# Altium PCB RK3568-SOM-Board.PcbDoc
Units mm, origin at the board's own origin, x right, y up, seen from the top; angles counter-clockwise.
Board outline 67.6 x 35.3 mm, 2 copper layers (Top Layer, Bottom Layer), stack 1.071 mm thick; 6 components, 100 nets, 1509 pads, 41 vias.
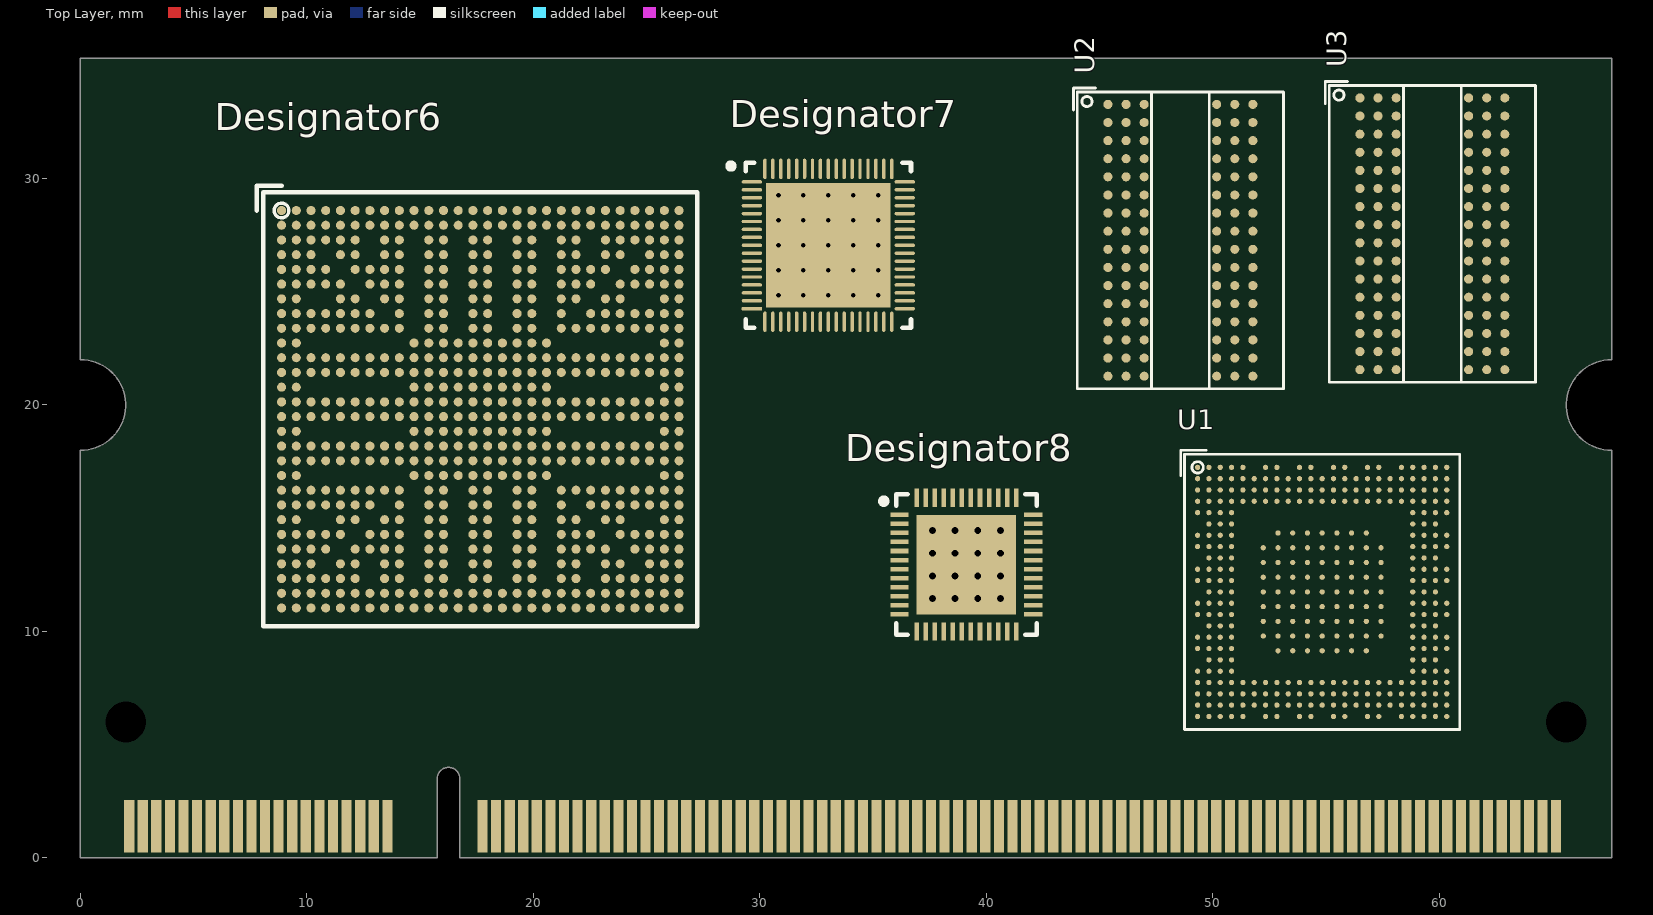
[diagram p0: Top Layer view]
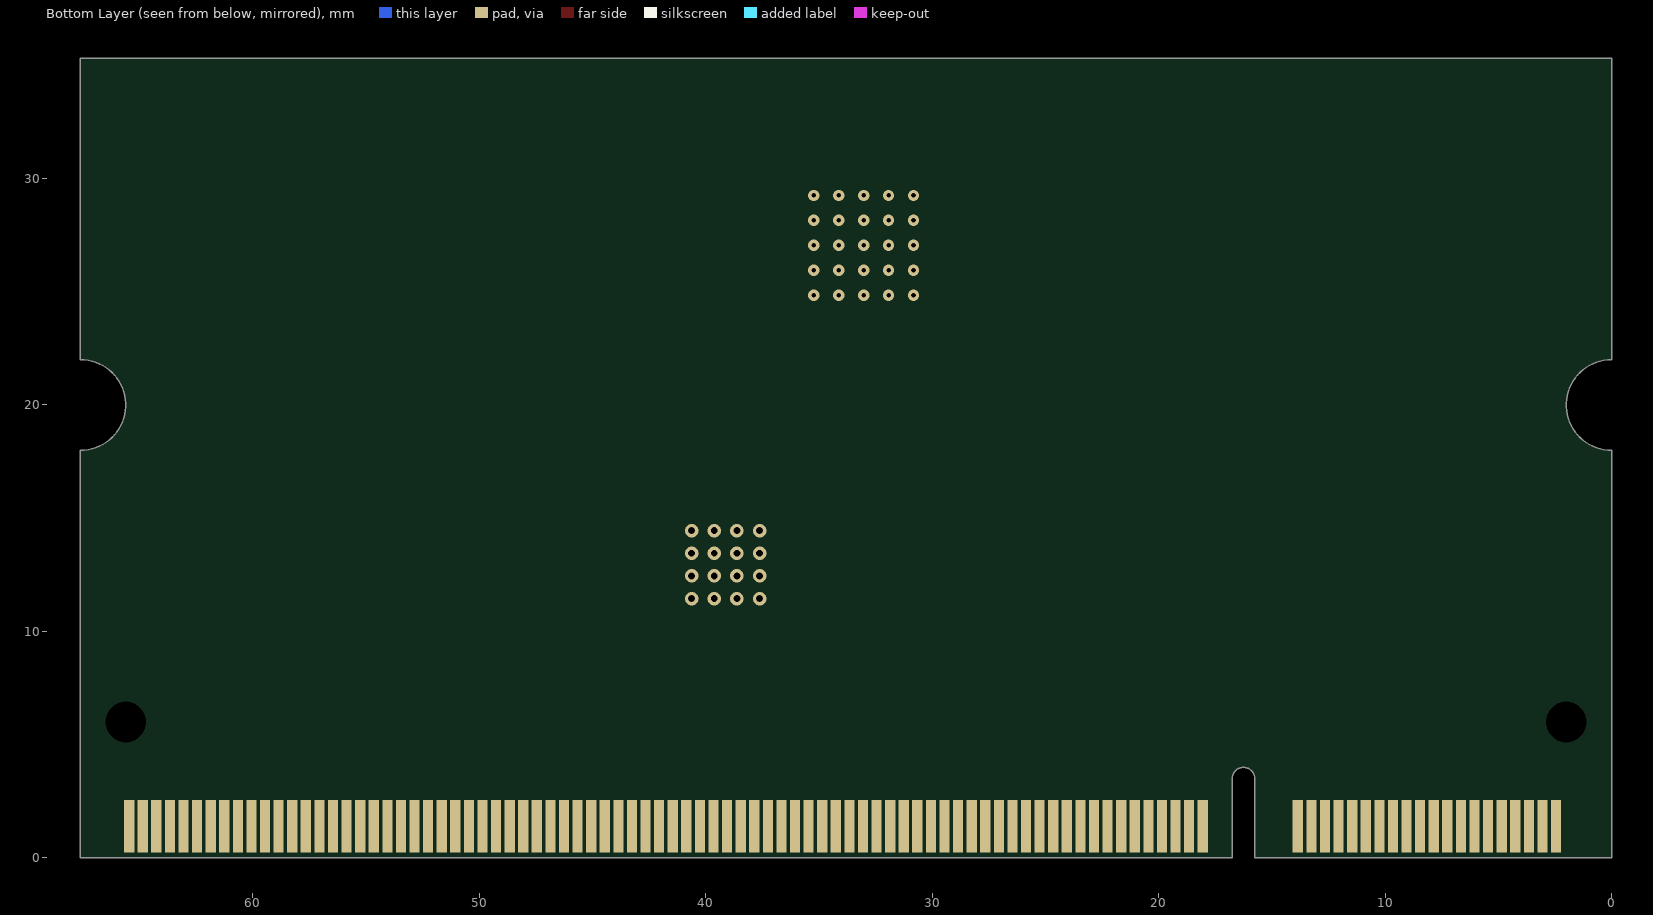
[diagram p1: Bottom Layer view, seen from below]

## Layer stack, top to bottom
Top Solder: solder mask 0.0102, Solder Resist, Dk 3.5
Top Layer: signal copper 0.0356
Dielectric 1: dielectric 1, FR-4, Dk 4.8
Bottom Layer: signal copper 0.0356
Bottom Solder: solder mask 0.0102, Solder Resist, Dk 3.5

## Board outline
0,0 0,18 ccw(c0,20) 0,22 0,35.3 67.6,35.3 67.6,22 ccw(c67.6,20) 67.6,18 67.6,0 16.75,0 16.75,3.5 ccw(c16.25,3.5) 15.75,3.5 15.75,0

## Design rules (kind name [scope] priority, off if disabled: settings)
Clearance [All] p1: gap=0.254 ignorepadtopadclearanceinfootprint=FALSE except(0: Arc-Hole Track-Hole SMDPad-Hole THPad-Hole Via-Hole Fill-Hole Poly-Hole Region-Hole Text-Hole)
PolygonConnect [All] p1: connectstyle=Relief reliefconductorwidth=0.254 reliefentries=4 polygonreliefangle="90 Angle" airgapwidth=0.254
RoomDefinition STM32MP1-SOM [InComponentClass('STM32MP1-SOM')] p1: confinementstyle=ConfineIn formatcopy=TRUE lockcomponents=FALSE outline 3,4 3,20 ccw(c0,20) 0,23 0,35.3 67.6,35.3 67.6,23 ccw(c67.6,20) 64.6,20 64.6,4 18.25,4 18.25,4.2 14.25,4.2 14.25,4
RoutingVias [All] p1: holewidth=0.711 width=1.27 viastyle="Through Hole" minholewidth=0.711 minwidth=1.27 maxholewidth=0.711 maxwidth=1.27
SolderMaskExpansion [All] p1: expansion=0.102 istentingtop=FALSE
Width [All] p1: maxlimit=0.254 minlimit=0.254 preferedwidth=0.254
30 further rules are at their usual default settings.

## Classes and differential pairs
component class STM32MP1-SOM: C? J? Mod? R? U?

## Components (designator, comment, footprint, x,y, rotation, side; value= is the part's Value field where it differs from the comment)
Designator6 "Comment" FCBGA636L 17.653,19.812 r0 top
Designator7 "Comment" QFN35P700X700X80_HS-69N 33.02,27.051 r0 top
Designator8 "Comment" QFN40P600X600X100V 39.116,12.954 r0 top
U1 "STM32MP157CAC3" ICC_TFBGA361_12X12_STM32MP157CAC3_P050-065 54.824,11.747 r0 top
U2 "NT5CC256M16ER-EK" ICC_VFBGA96_9X13_P080 48.565,27.273 r0 top
U3 "NT5CC256M16ER-EK" ICC_VFBGA96_9X13_P080 59.69,27.559 r0 top (schematic designator U2)

## Footprints (in the part's own frame and the unit in brackets; to place one, negate y for a bottom-side part, rotate by r counter-clockwise, add the part's x,y. Pads: shape width x height; smd on the part's side, far side on the other; paste and mask are expansions set on the pad)
FCBGA636L [mm] "SMD"
  round 0.4 smd mask+0: A1(-8.775,8.775) A2(-8.125,8.775) A3(-7.475,8.775) A4(-6.825,8.775) A5(-6.175,8.775) A6(-5.525,8.775) A7(-4.875,8.775) A8(-4.225,8.775) A9(-3.575,8.775) A10(-2.925,8.775) A11(-2.275,8.775) A12(-1.625,8.775) A13(-0.975,8.775) A14(-0.325,8.775) A15(0.325,8.775) A16(0.975,8.775) A17(1.625,8.775) A18(2.275,8.775) A19(2.925,8.775) A20(3.575,8.775) A21(4.225,8.775) A22(4.875,8.775) A23(5.525,8.775) A24(6.175,8.775) A25(6.825,8.775) A26(7.475,8.775) A27(8.125,8.775) A28(8.775,8.775) AA1(-8.775,-4.225) AA2(-8.125,-4.225) AA3(-7.475,-4.225) AA4(-6.825,-4.225) AA5(-6.175,-4.225) AA6(-5.525,-4.225) AA7(-4.875,-4.225) AA9(-3.575,-4.225) AA11(-2.275,-4.225) AA12(-1.625,-4.225) AA14(-0.325,-4.225) AA15(0.325,-4.225) AA17(1.625,-4.225) AA18(2.275,-4.225) AA20(3.575,-4.225) AA22(4.875,-4.225) AA23(5.525,-4.225) AA24(6.175,-4.225) AA25(6.825,-4.225) AA26(7.475,-4.225) AA27(8.125,-4.225) AA28(8.775,-4.225) AB1(-8.775,-4.875) AB2(-8.125,-4.875) AB5(-6.175,-4.875) AB6(-5.525,-4.875) AB8(-4.225,-4.875) AB9(-3.575,-4.875) AB11(-2.275,-4.875) AB12(-1.625,-4.875) AB14(-0.325,-4.875) AB15(0.325,-4.875) AB17(1.625,-4.875) AB18(2.275,-4.875) AB20(3.575,-4.875) AB21(4.225,-4.875) AB23(5.525,-4.875) AB24(6.175,-4.875) AB27(8.125,-4.875) AB28(8.775,-4.875) AC1(-8.775,-5.525) AC2(-8.125,-5.525) AC3(-7.475,-5.525) AC4(-6.825,-5.525) AC5(-6.175,-5.525) AC7(-4.875,-5.525) AC8(-4.225,-5.525) AC9(-3.575,-5.525) AC11(-2.275,-5.525) AC12(-1.625,-5.525) AC14(-0.325,-5.525) AC15(0.325,-5.525) AC17(1.625,-5.525) AC18(2.275,-5.525) AC20(3.575,-5.525) AC21(4.225,-5.525) AC22(4.875,-5.525) AC24(6.175,-5.525) AC25(6.825,-5.525) AC26(7.475,-5.525) AC27(8.125,-5.525) AC28(8.775,-5.525) AD1(-8.775,-6.175) AD2(-8.125,-6.175) AD3(-7.475,-6.175) AD4(-6.825,-6.175) AD6(-5.525,-6.175) AD7(-4.875,-6.175) AD8(-4.225,-6.175) AD9(-3.575,-6.175) AD11(-2.275,-6.175) AD12(-1.625,-6.175) AD14(-0.325,-6.175) AD15(0.325,-6.175) AD17(1.625,-6.175) AD18(2.275,-6.175) AD20(3.575,-6.175) AD21(4.225,-6.175) AD22(4.875,-6.175) AD23(5.525,-6.175) AD25(6.825,-6.175) AD26(7.475,-6.175) AD27(8.125,-6.175) AD28(8.775,-6.175) AE1(-8.775,-6.825) AE2(-8.125,-6.825) AE3(-7.475,-6.825) AE5(-6.175,-6.825) AE6(-5.525,-6.825) AE8(-4.225,-6.825) AE9(-3.575,-6.825) AE11(-2.275,-6.825) AE12(-1.625,-6.825) AE14(-0.325,-6.825) AE15(0.325,-6.825) AE17(1.625,-6.825) AE18(2.275,-6.825) AE20(3.575,-6.825) AE21(4.225,-6.825) AE23(5.525,-6.825) AE24(6.175,-6.825) AE26(7.475,-6.825) AE27(8.125,-6.825) AE28(8.775,-6.825) AF1(-8.775,-7.475) AF2(-8.125,-7.475) AF3(-7.475,-7.475) AF4(-6.825,-7.475) AF5(-6.175,-7.475) AF6(-5.525,-7.475) AF8(-4.225,-7.475) AF9(-3.575,-7.475) AF11(-2.275,-7.475) AF12(-1.625,-7.475) AF14(-0.325,-7.475) AF15(0.325,-7.475) AF17(1.625,-7.475) AF18(2.275,-7.475) AF20(3.575,-7.475) AF21(4.225,-7.475) AF23(5.525,-7.475) AF24(6.175,-7.475) AF25(6.825,-7.475) AF26(7.475,-7.475) AF27(8.125,-7.475) AF28(8.775,-7.475) AG1(-8.775,-8.125) AG2(-8.125,-8.125) AG3(-7.475,-8.125) AG4(-6.825,-8.125) AG5(-6.175,-8.125) AG6(-5.525,-8.125) AG7(-4.875,-8.125) AG8(-4.225,-8.125) AG9(-3.575,-8.125) AG10(-2.925,-8.125) AG11(-2.275,-8.125) AG12(-1.625,-8.125) AG13(-0.975,-8.125) AG14(-0.325,-8.125) AG15(0.325,-8.125) AG16(0.975,-8.125) AG17(1.625,-8.125) AG18(2.275,-8.125) AG19(2.925,-8.125) AG20(3.575,-8.125) AG21(4.225,-8.125) AG22(4.875,-8.125) AG23(5.525,-8.125) AG24(6.175,-8.125) AG25(6.825,-8.125) AG26(7.475,-8.125) AG27(8.125,-8.125) AG28(8.775,-8.125) AH1(-8.775,-8.775) AH2(-8.125,-8.775) AH3(-7.475,-8.775) AH4(-6.825,-8.775) AH5(-6.175,-8.775) AH6(-5.525,-8.775) AH7(-4.875,-8.775) AH8(-4.225,-8.775) AH9(-3.575,-8.775) AH10(-2.925,-8.775) AH11(-2.275,-8.775) AH12(-1.625,-8.775) AH13(-0.975,-8.775) AH14(-0.325,-8.775) AH15(0.325,-8.775) AH16(0.975,-8.775) AH17(1.625,-8.775) AH18(2.275,-8.775) AH19(2.925,-8.775) AH20(3.575,-8.775) AH21(4.225,-8.775) AH22(4.875,-8.775) AH23(5.525,-8.775) AH24(6.175,-8.775) AH25(6.825,-8.775) AH26(7.475,-8.775) AH27(8.125,-8.775) AH28(8.775,-8.775) B1(-8.775,8.125) B2(-8.125,8.125) B3(-7.475,8.125) B4(-6.825,8.125) B5(-6.175,8.125) B6(-5.525,8.125) B7(-4.875,8.125) B8(-4.225,8.125) B9(-3.575,8.125) B10(-2.925,8.125) B11(-2.275,8.125) B12(-1.625,8.125) B13(-0.975,8.125) B14(-0.325,8.125) B15(0.325,8.125) B16(0.975,8.125) B17(1.625,8.125) B18(2.275,8.125) B19(2.925,8.125) B20(3.575,8.125) B21(4.225,8.125) B22(4.875,8.125) B23(5.525,8.125) B24(6.175,8.125) B25(6.825,8.125) B26(7.475,8.125) B27(8.125,8.125) B28(8.775,8.125) C1(-8.775,7.475) C2(-8.125,7.475) C3(-7.475,7.475) C4(-6.825,7.475) C5(-6.175,7.475) C6(-5.525,7.475) C8(-4.225,7.475) C9(-3.575,7.475) C11(-2.275,7.475) C12(-1.625,7.475) C14(-0.325,7.475) C15(0.325,7.475) C17(1.625,7.475) C18(2.275,7.475) C20(3.575,7.475) C21(4.225,7.475) C23(5.525,7.475) C24(6.175,7.475) C25(6.825,7.475) C26(7.475,7.475) C27(8.125,7.475) C28(8.775,7.475) D1(-8.775,6.825) D2(-8.125,6.825) D3(-7.475,6.825) D5(-6.175,6.825) D6(-5.525,6.825) D8(-4.225,6.825) D9(-3.575,6.825) D11(-2.275,6.825) D12(-1.625,6.825) D14(-0.325,6.825) D15(0.325,6.825) D17(1.625,6.825) D18(2.275,6.825) D20(3.575,6.825) D21(4.225,6.825) D23(5.525,6.825) D24(6.175,6.825) D26(7.475,6.825) D27(8.125,6.825) D28(8.775,6.825) E1(-8.775,6.175) E2(-8.125,6.175) E3(-7.475,6.175) E4(-6.825,6.175) E6(-5.525,6.175) E7(-4.875,6.175) E8(-4.225,6.175) E9(-3.575,6.175) E11(-2.275,6.175) E12(-1.625,6.175) E14(-0.325,6.175) E15(0.325,6.175) E17(1.625,6.175) E18(2.275,6.175) E20(3.575,6.175) E21(4.225,6.175) E22(4.875,6.175) E23(5.525,6.175) E25(6.825,6.175) E26(7.475,6.175) E27(8.125,6.175) E28(8.775,6.175) F1(-8.775,5.525) F2(-8.125,5.525) F3(-7.475,5.525) F4(-6.825,5.525) F5(-6.175,5.525) F7(-4.875,5.525) F8(-4.225,5.525) F9(-3.575,5.525) F11(-2.275,5.525) F12(-1.625,5.525) F14(-0.325,5.525) F15(0.325,5.525) F17(1.625,5.525) F18(2.275,5.525) F20(3.575,5.525) F21(4.225,5.525) F22(4.875,5.525) F24(6.175,5.525) F25(6.825,5.525) F26(7.475,5.525) F27(8.125,5.525) F28(8.775,5.525) G1(-8.775,4.875) G2(-8.125,4.875) G5(-6.175,4.875) G6(-5.525,4.875) G8(-4.225,4.875) G9(-3.575,4.875) G11(-2.275,4.875) G12(-1.625,4.875) G14(-0.325,4.875) G15(0.325,4.875) G17(1.625,4.875) G18(2.275,4.875) G20(3.575,4.875) G21(4.225,4.875) G23(5.525,4.875) G24(6.175,4.875) G27(8.125,4.875) G28(8.775,4.875) H1(-8.775,4.225) H2(-8.125,4.225) H3(-7.475,4.225) H4(-6.825,4.225) H5(-6.175,4.225) H6(-5.525,4.225) H7(-4.875,4.225) H9(-3.575,4.225) H11(-2.275,4.225) H12(-1.625,4.225) H14(-0.325,4.225) H15(0.325,4.225) H17(1.625,4.225) H18(2.275,4.225) H20(3.575,4.225) H22(4.875,4.225) H23(5.525,4.225) H24(6.175,4.225) H25(6.825,4.225) H26(7.475,4.225) H27(8.125,4.225) H28(8.775,4.225) J1(-8.775,3.575) J2(-8.125,3.575) J3(-7.475,3.575) J4(-6.825,3.575) J5(-6.175,3.575) J6(-5.525,3.575) J7(-4.875,3.575) J8(-4.225,3.575) J9(-3.575,3.575) J11(-2.275,3.575) J12(-1.625,3.575) J14(-0.325,3.575) J15(0.325,3.575) J17(1.625,3.575) J18(2.275,3.575) J20(3.575,3.575) J21(4.225,3.575) J22(4.875,3.575) J23(5.525,3.575) J24(6.175,3.575) J25(6.825,3.575) J26(7.475,3.575) J27(8.125,3.575) J28(8.775,3.575) K1(-8.775,2.925) K2(-8.125,2.925) K10(-2.925,2.925) K11(-2.275,2.925) K12(-1.625,2.925) K13(-0.975,2.925) K14(-0.325,2.925) K15(0.325,2.925) K16(0.975,2.925) K17(1.625,2.925) K18(2.275,2.925) K19(2.925,2.925) K27(8.125,2.925) K28(8.775,2.925) L1(-8.775,2.275) L2(-8.125,2.275) L3(-7.475,2.275) L4(-6.825,2.275) L5(-6.175,2.275) L6(-5.525,2.275) L7(-4.875,2.275) L8(-4.225,2.275) L9(-3.575,2.275) L10(-2.925,2.275) L11(-2.275,2.275) L12(-1.625,2.275) L13(-0.975,2.275) L14(-0.325,2.275) L15(0.325,2.275) L16(0.975,2.275) L17(1.625,2.275) L18(2.275,2.275) L19(2.925,2.275) L20(3.575,2.275) L21(4.225,2.275) L22(4.875,2.275) L23(5.525,2.275) L24(6.175,2.275) L25(6.825,2.275) L26(7.475,2.275) L27(8.125,2.275) L28(8.775,2.275) M1(-8.775,1.625) M2(-8.125,1.625) M3(-7.475,1.625) M4(-6.825,1.625) M5(-6.175,1.625) M6(-5.525,1.625) M7(-4.875,1.625) M8(-4.225,1.625) M9(-3.575,1.625) M10(-2.925,1.625) M11(-2.275,1.625) M12(-1.625,1.625) M13(-0.975,1.625) M14(-0.325,1.625) M15(0.325,1.625) M16(0.975,1.625) M17(1.625,1.625) M18(2.275,1.625) M19(2.925,1.625) M20(3.575,1.625) M21(4.225,1.625) M22(4.875,1.625) M23(5.525,1.625) M24(6.175,1.625) M25(6.825,1.625) M26(7.475,1.625) M27(8.125,1.625) M28(8.775,1.625) N1(-8.775,0.975) N2(-8.125,0.975) N10(-2.925,0.975) N11(-2.275,0.975) N12(-1.625,0.975) N13(-0.975,0.975) N14(-0.325,0.975) N15(0.325,0.975) N16(0.975,0.975) N17(1.625,0.975) N18(2.275,0.975) N19(2.925,0.975) N27(8.125,0.975) N28(8.775,0.975) P1(-8.775,0.325) P2(-8.125,0.325) P3(-7.475,0.325) P4(-6.825,0.325) P5(-6.175,0.325) P6(-5.525,0.325) P7(-4.875,0.325) P8(-4.225,0.325) P9(-3.575,0.325) P10(-2.925,0.325) P11(-2.275,0.325) P12(-1.625,0.325) P13(-0.975,0.325) P14(-0.325,0.325) P15(0.325,0.325) P16(0.975,0.325) P17(1.625,0.325) P18(2.275,0.325) P19(2.925,0.325) P20(3.575,0.325) P21(4.225,0.325) P22(4.875,0.325) P23(5.525,0.325) P24(6.175,0.325) P25(6.825,0.325) P26(7.475,0.325) P27(8.125,0.325) P28(8.775,0.325) R1(-8.775,-0.325) R2(-8.125,-0.325) R3(-7.475,-0.325) R4(-6.825,-0.325) R5(-6.175,-0.325) R6(-5.525,-0.325) R7(-4.875,-0.325) R8(-4.225,-0.325) R9(-3.575,-0.325) R10(-2.925,-0.325) R11(-2.275,-0.325) R12(-1.625,-0.325) R13(-0.975,-0.325) R14(-0.325,-0.325) R15(0.325,-0.325) R16(0.975,-0.325) R17(1.625,-0.325) R18(2.275,-0.325) R19(2.925,-0.325) R20(3.575,-0.325) R21(4.225,-0.325) R22(4.875,-0.325) R23(5.525,-0.325) R24(6.175,-0.325) R25(6.825,-0.325) R26(7.475,-0.325) R27(8.125,-0.325) R28(8.775,-0.325) T1(-8.775,-0.975) T2(-8.125,-0.975) T10(-2.925,-0.975) T11(-2.275,-0.975) T12(-1.625,-0.975) T13(-0.975,-0.975) T14(-0.325,-0.975) T15(0.325,-0.975) T16(0.975,-0.975) T17(1.625,-0.975) T18(2.275,-0.975) T19(2.925,-0.975) T27(8.125,-0.975) T28(8.775,-0.975) U1(-8.775,-1.625) U2(-8.125,-1.625) U3(-7.475,-1.625) U4(-6.825,-1.625) U5(-6.175,-1.625) U6(-5.525,-1.625) U7(-4.875,-1.625) U8(-4.225,-1.625) U9(-3.575,-1.625) U10(-2.925,-1.625) U11(-2.275,-1.625) U12(-1.625,-1.625) U13(-0.975,-1.625) U14(-0.325,-1.625) U15(0.325,-1.625) U16(0.975,-1.625) U17(1.625,-1.625) U18(2.275,-1.625) U19(2.925,-1.625) U20(3.575,-1.625) U21(4.225,-1.625) U22(4.875,-1.625) U23(5.525,-1.625) U24(6.175,-1.625) U25(6.825,-1.625) U26(7.475,-1.625) U27(8.125,-1.625) U28(8.775,-1.625) V1(-8.775,-2.275) V2(-8.125,-2.275) V3(-7.475,-2.275) V4(-6.825,-2.275) V5(-6.175,-2.275) V6(-5.525,-2.275) V7(-4.875,-2.275) V8(-4.225,-2.275) V9(-3.575,-2.275) V10(-2.925,-2.275) V11(-2.275,-2.275) V12(-1.625,-2.275) V13(-0.975,-2.275) V14(-0.325,-2.275) V15(0.325,-2.275) V16(0.975,-2.275) V17(1.625,-2.275) V18(2.275,-2.275) V19(2.925,-2.275) V20(3.575,-2.275) V21(4.225,-2.275) V22(4.875,-2.275) V23(5.525,-2.275) V24(6.175,-2.275) V25(6.825,-2.275) V26(7.475,-2.275) V27(8.125,-2.275) V28(8.775,-2.275) W1(-8.775,-2.925) W2(-8.125,-2.925) W10(-2.925,-2.925) W11(-2.275,-2.925) W12(-1.625,-2.925) W13(-0.975,-2.925) W14(-0.325,-2.925) W15(0.325,-2.925) W16(0.975,-2.925) W17(1.625,-2.925) W18(2.275,-2.925) W19(2.925,-2.925) W27(8.125,-2.925) W28(8.775,-2.925) Y1(-8.775,-3.575) Y2(-8.125,-3.575) Y3(-7.475,-3.575) Y4(-6.825,-3.575) Y5(-6.175,-3.575) Y6(-5.525,-3.575) Y7(-4.875,-3.575) Y8(-4.225,-3.575) Y9(-3.575,-3.575) Y11(-2.275,-3.575) Y12(-1.625,-3.575) Y14(-0.325,-3.575) Y15(0.325,-3.575) Y17(1.625,-3.575) Y18(2.275,-3.575) Y20(3.575,-3.575) Y21(4.225,-3.575) Y22(4.875,-3.575) Y23(5.525,-3.575) Y24(6.175,-3.575) Y25(6.825,-3.575) Y26(7.475,-3.575) Y27(8.125,-3.575) Y28(8.775,-3.575)
  silkscreen extent -9.87,-9.57 9.57,9.87, body extent -9.57,-9.57 9.58,9.58, height 1.58
ICC_TFBGA361_12X12_STM32MP157CAC3_P050-065 [mm] "IPC"
  round 0.23 smd mask+0.05: 1A2(-1.95,2.6) 1A3(-1.3,2.6) 1A4(-0.65,2.6) 1A5(0,2.6) 1A6(0.65,2.6) 1A7(1.3,2.6) 1A8(1.95,2.6) 1B1(-2.6,1.95) 1B2(-1.95,1.95) 1B3(-1.3,1.95) 1B4(-0.65,1.95) 1B5(0,1.95) 1B6(0.65,1.95) 1B7(1.3,1.95) 1B8(1.95,1.95) 1B9(2.6,1.95) 1C1(-2.6,1.3) 1C2(-1.95,1.3) 1C3(-1.3,1.3) 1C4(-0.65,1.3) 1C5(0,1.3) 1C6(0.65,1.3) 1C7(1.3,1.3) 1C8(1.95,1.3) 1C9(2.6,1.3) 1D1(-2.6,0.65) 1D2(-1.95,0.65) 1D3(-1.3,0.65) 1D4(-0.65,0.65) 1D5(0,0.65) 1D6(0.65,0.65) 1D7(1.3,0.65) 1D8(1.95,0.65) 1D9(2.6,0.65) 1E1(-2.6,0) 1E2(-1.95,0) 1E3(-1.3,0) 1E4(-0.65,0) 1E5(0,0) 1E6(0.65,0) 1E7(1.3,0) 1E8(1.95,0) 1E9(2.6,0) 1F1(-2.6,-0.65) 1F2(-1.95,-0.65) 1F3(-1.3,-0.65) 1F4(-0.65,-0.65) 1F5(0,-0.65) 1F6(0.65,-0.65) 1F7(1.3,-0.65) 1F8(1.95,-0.65) 1F9(2.6,-0.65) 1G1(-2.6,-1.3) 1G2(-1.95,-1.3) 1G3(-1.3,-1.3) 1G4(-0.65,-1.3) 1G5(0,-1.3) 1G6(0.65,-1.3) 1G7(1.3,-1.3) 1G8(1.95,-1.3) 1G9(2.6,-1.3) 1H1(-2.6,-1.95) 1H2(-1.95,-1.95) 1H3(-1.3,-1.95) 1H4(-0.65,-1.95) 1H5(0,-1.95) 1H6(0.65,-1.95) 1H7(1.3,-1.95) 1H8(1.95,-1.95) 1H9(2.6,-1.95) 1J2(-1.95,-2.6) 1J3(-1.3,-2.6) 1J4(-0.65,-2.6) 1J5(0,-2.6) 1J6(0.65,-2.6) 1J7(1.3,-2.6) 1J8(1.95,-2.6) A1(-5.5,5.5) A2(-5,5.5) A3(-4.5,5.5) A4(-4,5.5) A5(-3.5,5.5) A7(-2.5,5.5) A8(-2,5.5) A10(-1,5.5) A11(-0.5,5.5) A13(0.5,5.5) A14(1,5.5) A16(2,5.5) A17(2.5,5.5) A19(3.5,5.5) A20(4,5.5) A21(4.5,5.5) A22(5,5.5) A23(5.5,5.5) AA1(-5.5,-4.5) AA2(-5,-4.5) AA3(-4.5,-4.5) AA4(-4,-4.5) AA5(-3.5,-4.5) AA6(-3,-4.5) AA7(-2.5,-4.5) AA8(-2,-4.5) AA9(-1.5,-4.5) AA10(-1,-4.5) AA11(-0.5,-4.5) AA12(0,-4.5) AA13(0.5,-4.5) AA14(1,-4.5) AA15(1.5,-4.5) AA16(2,-4.5) AA17(2.5,-4.5) AA18(3,-4.5) AA19(3.5,-4.5) AA20(4,-4.5) AA21(4.5,-4.5) AA22(5,-4.5) AA23(5.5,-4.5) AB1(-5.5,-5) AB2(-5,-5) AB3(-4.5,-5) AB4(-4,-5) AB5(-3.5,-5) AB6(-3,-5) AB7(-2.5,-5) AB8(-2,-5) AB9(-1.5,-5) AB10(-1,-5) AB11(-0.5,-5) AB12(0,-5) AB13(0.5,-5) AB14(1,-5) AB15(1.5,-5) AB16(2,-5) AB17(2.5,-5) AB18(3,-5) AB19(3.5,-5) AB20(4,-5) AB21(4.5,-5) AB22(5,-5) AB23(5.5,-5) AC1(-5.5,-5.5) AC2(-5,-5.5) AC3(-4.5,-5.5) AC4(-4,-5.5) AC5(-3.5,-5.5) AC7(-2.5,-5.5) AC8(-2,-5.5) AC10(-1,-5.5) AC11(-0.5,-5.5) AC13(0.5,-5.5) AC14(1,-5.5) AC16(2,-5.5) AC17(2.5,-5.5) AC19(3.5,-5.5) AC20(4,-5.5) AC21(4.5,-5.5) AC22(5,-5.5) AC23(5.5,-5.5) B1(-5.5,5) B2(-5,5) B3(-4.5,5) B4(-4,5) B5(-3.5,5) B6(-3,5) B7(-2.5,5) B8(-2,5) B9(-1.5,5) B10(-1,5) B11(-0.5,5) B12(0,5) B13(0.5,5) B14(1,5) B15(1.5,5) B16(2,5) B17(2.5,5) B18(3,5) B19(3.5,5) B20(4,5) B21(4.5,5) B22(5,5) B23(5.5,5) C1(-5.5,4.5) C2(-5,4.5) C3(-4.5,4.5) C4(-4,4.5) C5(-3.5,4.5) C6(-3,4.5) C7(-2.5,4.5) C8(-2,4.5) C9(-1.5,4.5) C10(-1,4.5) C11(-0.5,4.5) C12(0,4.5) C13(0.5,4.5) C14(1,4.5) C15(1.5,4.5) C16(2,4.5) C17(2.5,4.5) C18(3,4.5) C19(3.5,4.5) C20(4,4.5) C21(4.5,4.5) C22(5,4.5) C23(5.5,4.5) D1(-5.5,4) D2(-5,4) D3(-4.5,4) D4(-4,4) D5(-3.5,4) D6(-3,4) D7(-2.5,4) D8(-2,4) D9(-1.5,4) D10(-1,4) D11(-0.5,4) D12(0,4) D13(0.5,4) D14(1,4) D15(1.5,4) D16(2,4) D17(2.5,4) D18(3,4) D19(3.5,4) D20(4,4) D21(4.5,4) D22(5,4) D23(5.5,4) E1(-5.5,3.5) E2(-5,3.5) E3(-4.5,3.5) E4(-4,3.5) E20(4,3.5) E21(4.5,3.5) E22(5,3.5) E23(5.5,3.5) F2(-5,3) F3(-4.5,3) F4(-4,3) F20(4,3) F21(4.5,3) F22(5,3) G1(-5.5,2.5) G2(-5,2.5) G3(-4.5,2.5) G4(-4,2.5) G20(4,2.5) G21(4.5,2.5) G22(5,2.5) G23(5.5,2.5) H1(-5.5,2) H2(-5,2) H3(-4.5,2) H4(-4,2) H20(4,2) H21(4.5,2) H22(5,2) H23(5.5,2) J2(-5,1.5) J3(-4.5,1.5) J4(-4,1.5) J20(4,1.5) J21(4.5,1.5) J22(5,1.5) K1(-5.5,1) K2(-5,1) K3(-4.5,1) K4(-4,1) K20(4,1) K21(4.5,1) K22(5,1) K23(5.5,1) L1(-5.5,0.5) L2(-5,0.5) L3(-4.5,0.5) L4(-4,0.5) L20(4,0.5) L21(4.5,0.5) L22(5,0.5) L23(5.5,0.5) M2(-5,0) M3(-4.5,0) M4(-4,0) M20(4,0) M21(4.5,0) M22(5,0) N1(-5.5,-0.5) N2(-5,-0.5) N3(-4.5,-0.5) N4(-4,-0.5) N20(4,-0.5) N21(4.5,-0.5) N22(5,-0.5) N23(5.5,-0.5) P1(-5.5,-1) P2(-5,-1) P3(-4.5,-1) P4(-4,-1) P20(4,-1) P21(4.5,-1) P22(5,-1) P23(5.5,-1) R2(-5,-1.5) R3(-4.5,-1.5) R4(-4,-1.5) R20(4,-1.5) R21(4.5,-1.5) R22(5,-1.5) T1(-5.5,-2) T2(-5,-2) T3(-4.5,-2) T4(-4,-2) T20(4,-2) T21(4.5,-2) T22(5,-2) T23(5.5,-2) U1(-5.5,-2.5) U2(-5,-2.5) U3(-4.5,-2.5) U4(-4,-2.5) U20(4,-2.5) U21(4.5,-2.5) U22(5,-2.5) U23(5.5,-2.5) V2(-5,-3) V3(-4.5,-3) V4(-4,-3) V20(4,-3) V21(4.5,-3) V22(5,-3) W1(-5.5,-3.5) W2(-5,-3.5) W3(-4.5,-3.5) W4(-4,-3.5) W20(4,-3.5) W21(4.5,-3.5) W22(5,-3.5) W23(5.5,-3.5) Y1(-5.5,-4) Y2(-5,-4) Y3(-4.5,-4) Y4(-4,-4) Y5(-3.5,-4) Y6(-3,-4) Y7(-2.5,-4) Y8(-2,-4) Y9(-1.5,-4) Y10(-1,-4) Y11(-0.5,-4) Y12(0,-4) Y13(0.5,-4) Y14(1,-4) Y15(1.5,-4) Y16(2,-4) Y17(2.5,-4) Y18(3,-4) Y19(3.5,-4) Y20(4,-4) Y21(4.5,-4) Y22(5,-4) Y23(5.5,-4)
  silkscreen extent -6.25,-6.07 6.07,6.25, body extent -6.07,-6.07 6.07,6.07, height 1.21
ICC_VFBGA96_9X13_P080 [mm]
  round 0.4 smd mask+0.05: A1(-3.2,6) A2(-2.4,6) A3(-1.6,6) A7(1.6,6) A8(2.4,6) A9(3.2,6) B1(-3.2,5.2) B2(-2.4,5.2) B3(-1.6,5.2) B7(1.6,5.2) B8(2.4,5.2) B9(3.2,5.2) C1(-3.2,4.4) C2(-2.4,4.4) C3(-1.6,4.4) C7(1.6,4.4) C8(2.4,4.4) C9(3.2,4.4) D1(-3.2,3.6) D2(-2.4,3.6) D3(-1.6,3.6) D7(1.6,3.6) D8(2.4,3.6) D9(3.2,3.6) E1(-3.2,2.8) E2(-2.4,2.8) E3(-1.6,2.8) E7(1.6,2.8) E8(2.4,2.8) E9(3.2,2.8) F1(-3.2,2) F2(-2.4,2) F3(-1.6,2) F7(1.6,2) F8(2.4,2) F9(3.2,2) G1(-3.2,1.2) G2(-2.4,1.2) G3(-1.6,1.2) G7(1.6,1.2) G8(2.4,1.2) G9(3.2,1.2) H1(-3.2,0.4) H2(-2.4,0.4) H3(-1.6,0.4) H7(1.6,0.4) H8(2.4,0.4) H9(3.2,0.4) J1(-3.2,-0.4) J2(-2.4,-0.4) J3(-1.6,-0.4) J7(1.6,-0.4) J8(2.4,-0.4) J9(3.2,-0.4) K1(-3.2,-1.2) K2(-2.4,-1.2) K3(-1.6,-1.2) K7(1.6,-1.2) K8(2.4,-1.2) K9(3.2,-1.2) L1(-3.2,-2) L2(-2.4,-2) L3(-1.6,-2) L7(1.6,-2) L8(2.4,-2) L9(3.2,-2) M1(-3.2,-2.8) M2(-2.4,-2.8) M3(-1.6,-2.8) M7(1.6,-2.8) M8(2.4,-2.8) M9(3.2,-2.8) N1(-3.2,-3.6) N2(-2.4,-3.6) N3(-1.6,-3.6) N7(1.6,-3.6) N8(2.4,-3.6) N9(3.2,-3.6) P1(-3.2,-4.4) P2(-2.4,-4.4) P3(-1.6,-4.4) P7(1.6,-4.4) P8(2.4,-4.4) P9(3.2,-4.4) R1(-3.2,-5.2) R2(-2.4,-5.2) R3(-1.6,-5.2) R7(1.6,-5.2) R8(2.4,-5.2) R9(3.2,-5.2) T1(-3.2,-6) T2(-2.4,-6) T3(-1.6,-6) T7(1.6,-6) T8(2.4,-6) T9(3.2,-6)
  silkscreen extent -4.72,-6.55 4.55,6.73, body extent -4.55,-6.55 4.55,6.55, height 1
QFN35P700X700X80_HS-69N [mm] "SMD"
  oval 0.9x0.15 smd: 1(-3.375,2.8) 2(-3.375,2.45) 3(-3.375,2.1) 4(-3.375,1.75) 5(-3.375,1.4) 6(-3.375,1.05) 7(-3.375,0.7) 8(-3.375,0.35) 9(-3.375,0) 10(-3.375,-0.35) 11(-3.375,-0.7) 12(-3.375,-1.05) 13(-3.375,-1.4) 14(-3.375,-1.75) 15(-3.375,-2.1) 16(-3.375,-2.45) 35(3.375,-2.8) 36(3.375,-2.45) 37(3.375,-2.1) 38(3.375,-1.75) 39(3.375,-1.4) 40(3.375,-1.05) 41(3.375,-0.7) 42(3.375,-0.35) 43(3.375,0) 44(3.375,0.35) 45(3.375,0.7) 46(3.375,1.05) 47(3.375,1.4) 48(3.375,1.75) 49(3.375,2.1) 50(3.375,2.45) 51(3.375,2.8)
  rrect50% 0.9x0.15 smd: 17(-3.375,-2.8)
  oval 0.15x0.9 smd: 18(-2.8,-3.375) 19(-2.45,-3.375) 20(-2.1,-3.375) 21(-1.75,-3.375) 22(-1.4,-3.375) 23(-1.05,-3.375) 24(-0.7,-3.375) 25(-0.35,-3.375) 26(0,-3.375) 27(0.35,-3.375) 28(0.7,-3.375) 29(1.05,-3.375) 30(1.4,-3.375) 31(1.75,-3.375) 32(2.1,-3.375) 33(2.45,-3.375) 34(2.8,-3.375) 52(2.8,3.375) 53(2.45,3.375) 54(2.1,3.375) 55(1.75,3.375) 56(1.4,3.375) 57(1.05,3.375) 58(0.7,3.375) 59(0.35,3.375) 60(0,3.375) 61(-0.35,3.375) 62(-0.7,3.375) 63(-1.05,3.375) 64(-1.4,3.375) 65(-1.75,3.375) 66(-2.1,3.375) 67(-2.45,3.375) 68(-2.8,3.375)
  rect 5.49x5.49 smd paste-5: ePAD(0,0)
  silkscreen extent -4.42,-3.65 3.65,3.65, body extent -3.5,-3.5 3.5,3.5, height 0.8
QFN40P600X600X100V [mm] "SMD"
  rect 0.8x0.2 smd paste-25.4: 1(-2.95,2.2) 2(-2.95,1.8) 3(-2.95,1.4) 4(-2.95,1) 5(-2.95,0.6) 6(-2.95,0.2) 7(-2.95,-0.2) 8(-2.95,-0.6) 9(-2.95,-1) 10(-2.95,-1.4) 11(-2.95,-1.8) 12(-2.95,-2.2) 25(2.95,-2.2) 26(2.95,-1.8) 27(2.95,-1.4) 28(2.95,-1) 29(2.95,-0.6) 30(2.95,-0.2) 31(2.95,0.2) 32(2.95,0.6) 33(2.95,1) 34(2.95,1.4) 35(2.95,1.8) 36(2.95,2.2)
  rect 0.2x0.8 smd paste-25.4: 13(-2.2,-2.95) 14(-1.8,-2.95) 15(-1.4,-2.95) 16(-1,-2.95) 17(-0.6,-2.95) 18(-0.2,-2.95) 19(0.2,-2.95) 20(0.6,-2.95) 21(1,-2.95) 22(1.4,-2.95) 23(1.8,-2.95) 24(2.2,-2.95) 37(2.2,2.95) 38(1.8,2.95) 39(1.4,2.95) 40(1,2.95) 41(0.6,2.95) 42(0.2,2.95) 43(-0.2,2.95) 44(-0.6,2.95) 45(-1,2.95) 46(-1.4,2.95) 47(-1.8,2.95) 48(-2.2,2.95)
  rect 4.4x4.4 smd paste-25.4: 49(0,0)
  silkscreen extent -3.77,-3.1 3.1,3.1, body extent -3.06,-3.06 3.06,3.06, height 0.8

## Part data
U1: library part MCD-00677, "MPU TFBGA12x12 secure boot+crypto", Manufacturer=STMICROELECTRONICS, BMS_Part_Number=9175503, California_Proposition_65=N/A, Company_Nationality=Netherlands, ComponentLink1Description=Datasheet, ComponentLink1URL=http://tunmcdsvn.tun.st.com/Component_Datasheet_Library/Trunk/IC/STM_MPU_12x12_POA_DM00342580_POA12x12, ECCN_EU=NEC, ECCN_US=5A002A4, Export_Juridiction=EU, Internal_Part_Number=MCD-00677, Manufacturer_Part_Number=STM32MP157CAC3, Part_Type=IC, Provided_By="SUBCO with ST control", Status="Footprint available"
U2 U3: library part MCD-01811, "Memory,DDR3L,4Gb,256Mbx16,933Mhz,1V35,TFBGA", Manufacturer=NANYA, BMS_Part_Number=9171435, ComponentLink1Description=Datasheet, ComponentLink1URL=http://tunmcdsvn.tun.st.com/Component_Datasheet_Library/Trunk/IC/Nanya_DDR3_NT5CC256M16ER-EK, ECCN_EU=tbd, ECCN_US=tbd, Internal_Part_Number=MCD-01811, Manufacturer_Part_Number=NT5CC256M16ER-EK, Part_Type=IC, Provided_By=SUBCO, Status=Released

## Free pads (board coordinates)
  rect 0.45x2.3 smd mask+0: 1(2.15,1.4) 3(2.75,1.4) 5(3.35,1.4) 7(3.95,1.4) 9(4.55,1.4) 11(5.15,1.4) 13(5.75,1.4) 15(6.35,1.4) 17(6.95,1.4) 19(7.55,1.4) 21(8.15,1.4) 23(8.75,1.4) 25(9.35,1.4) 27(9.95,1.4) 29(10.55,1.4) 31(11.15,1.4) 33(11.75,1.4) 35(12.35,1.4) 37(12.95,1.4) 39(13.55,1.4) 41(17.75,1.4) 43(18.35,1.4) 45(18.95,1.4) 47(19.55,1.4) 49(20.15,1.4) 51(20.75,1.4) 53(21.35,1.4) 55(21.95,1.4) 57(22.55,1.4) 59(23.15,1.4) 61(23.75,1.4) 63(24.35,1.4) 65(24.95,1.4) 67(25.55,1.4) 69(26.15,1.4) 71(26.75,1.4) 73(27.35,1.4) 75(27.95,1.4) 77(28.55,1.4) 79(29.15,1.4) 81(29.75,1.4) 83(30.35,1.4) 85(30.95,1.4) 87(31.55,1.4) 89(32.15,1.4) 91(32.75,1.4) 93(33.35,1.4) 95(33.95,1.4) 97(34.55,1.4) 99(35.15,1.4) 101(35.75,1.4) 103(36.35,1.4) 105(36.95,1.4) 107(37.55,1.4) 109(38.15,1.4) 111(38.75,1.4) 113(39.35,1.4) 115(39.95,1.4) 117(40.55,1.4) 119(41.15,1.4) 121(41.75,1.4) 123(42.35,1.4) 125(42.95,1.4) 127(43.55,1.4) 129(44.15,1.4) 131(44.75,1.4) 133(45.35,1.4) 135(45.95,1.4) 137(46.55,1.4) 139(47.15,1.4) 141(47.75,1.4) 143(48.35,1.4) 145(48.95,1.4) 147(49.55,1.4) 149(50.15,1.4) 151(50.75,1.4) 153(51.35,1.4) 155(51.95,1.4) 157(52.55,1.4) 159(53.15,1.4) 161(53.75,1.4) 163(54.35,1.4) 165(54.95,1.4) 167(55.55,1.4) 169(56.15,1.4) 171(56.75,1.4) 173(57.35,1.4) 175(57.95,1.4) 177(58.55,1.4) 179(59.15,1.4) 181(59.75,1.4) 183(60.35,1.4) 185(60.95,1.4) 187(61.55,1.4) 189(62.15,1.4) 191(62.75,1.4) 193(63.35,1.4) 195(63.95,1.4) 197(64.55,1.4) 199(65.15,1.4)
  rect 0.45x2.3 smd far side mask+0: 2(2.45,1.4) 4(3.05,1.4) 6(3.65,1.4) 8(4.25,1.4) 10(4.85,1.4) 12(5.45,1.4) 14(6.05,1.4) 16(6.65,1.4) 18(7.25,1.4) 20(7.85,1.4) 22(8.45,1.4) 24(9.05,1.4) 26(9.65,1.4) 28(10.25,1.4) 30(10.85,1.4) 32(11.45,1.4) 34(12.05,1.4) 36(12.65,1.4) 38(13.25,1.4) 40(13.85,1.4) 42(18.05,1.4) 44(18.65,1.4) 46(19.25,1.4) 48(19.85,1.4) 50(20.45,1.4) 52(21.05,1.4) 54(21.65,1.4) 56(22.25,1.4) 58(22.85,1.4) 60(23.45,1.4) 62(24.05,1.4) 64(24.65,1.4) 66(25.25,1.4) 68(25.85,1.4) 70(26.45,1.4) 72(27.05,1.4) 74(27.65,1.4) 76(28.25,1.4) 78(28.85,1.4) 80(29.45,1.4) 82(30.05,1.4) 84(30.65,1.4) 86(31.25,1.4) 88(31.85,1.4) 90(32.45,1.4) 92(33.05,1.4) 94(33.65,1.4) 96(34.25,1.4) 98(34.85,1.4) 100(35.45,1.4) 102(36.05,1.4) 104(36.65,1.4) 106(37.25,1.4) 108(37.85,1.4) 110(38.45,1.4) 112(39.05,1.4) 114(39.65,1.4) 116(40.25,1.4) 118(40.85,1.4) 120(41.45,1.4) 122(42.05,1.4) 124(42.65,1.4) 126(43.25,1.4) 128(43.85,1.4) 130(44.45,1.4) 132(45.05,1.4) 134(45.65,1.4) 136(46.25,1.4) 138(46.85,1.4) 140(47.45,1.4) 142(48.05,1.4) 144(48.65,1.4) 146(49.25,1.4) 148(49.85,1.4) 150(50.45,1.4) 152(51.05,1.4) 154(51.65,1.4) 156(52.25,1.4) 158(52.85,1.4) 160(53.45,1.4) 162(54.05,1.4) 164(54.65,1.4) 166(55.25,1.4) 168(55.85,1.4) 170(56.45,1.4) 172(57.05,1.4) 174(57.65,1.4) 176(58.25,1.4) 178(58.85,1.4) 180(59.45,1.4) 182(60.05,1.4) 184(60.65,1.4) 186(61.25,1.4) 188(61.85,1.4) 190(62.45,1.4) 192(63.05,1.4) 194(63.65,1.4) 196(64.25,1.4) 198(64.85,1.4) 200(65.45,1.4)
  round 1.6 hole 1.8 unplated mask+0: 21(2,6) 22(65.6,6)

## Via types
v1: diameter 0.5, hole 0.2, Top Layer to Bottom Layer, 25 vias
v2: diameter 0.6, hole 0.3, Top Layer to Bottom Layer, 16 vias

## Nets (pads, with @x,y where several pads share a name; then routed paths per layer and width w, separated by ;. In a path a pad name is that pad's centre, name@x,y a point inside that pad or via, vN(x,y) a via of type N, cw(c..) or ccw(c..) an arc to the next point about the centre after c; other vN are vias at no path point)
DDR_A0: 
DDR_A1: 
DDR_A2: 
DDR_A3: 
DDR_A4: 
DDR_A5: 
DDR_A6: 
DDR_A7: 
DDR_A8: 
DDR_A9: 
DDR_A10: 
DDR_A11: 
DDR_A12: 
DDR_A13: 
DDR_A14: 
DDR_BA0: 
DDR_BA1: 
DDR_BA2: 
DDR_CASN: 
DDR_CKE: 
DDR_CLK_N: 
DDR_CLK_P: 
DDR_CSN: 
DDR_DQ0: 
DDR_DQ1: 
DDR_DQ2: 
DDR_DQ3: 
DDR_DQ4: 
DDR_DQ5: 
DDR_DQ6: 
DDR_DQ7: 
DDR_DQ8: 
DDR_DQ9: 
DDR_DQ10: 
DDR_DQ11: 
DDR_DQ12: 
DDR_DQ13: 
DDR_DQ14: 
DDR_DQ15: 
DDR_DQ16: 
DDR_DQ17: 
DDR_DQ18: 
DDR_DQ19: 
DDR_DQ20: 
DDR_DQ21: 
DDR_DQ22: 
DDR_DQ23: 
DDR_DQ24: 
DDR_DQ25: 
DDR_DQ26: 
DDR_DQ27: 
DDR_DQ28: 
DDR_DQ29: 
DDR_DQ30: 
DDR_DQ31: 
DDR_DQM0: 
DDR_DQM1: 
DDR_DQM2: 
DDR_DQM3: 
DDR_DQS0_N: 
DDR_DQS0_P: 
DDR_DQS1_N: 
DDR_DQS1_P: 
DDR_DQS2_N: 
DDR_DQS2_P: 
DDR_DQS3_N: 
DDR_DQS3_P: 
DDR_ODT: 
DDR_RASN: 
DDR_RESETN: 
DDR_WEN: 
GND: 
I2C4_SCL: 
I2C4_SDA: 
NetC?_2: 
NetR?_1: 
NRST: 
PA0_WKUP: 
PWR_ON: 
SDMMC2_CK: 
SDMMC2_CMD: 
SDMMC2_D0: 
SDMMC2_D1: 
SDMMC2_D2: 
SDMMC2_D3: 
SDMMC2_D4: 
SDMMC2_D5: 
SDMMC2_D6: 
SDMMC2_D7: 
USB_OTG_DN: 
USB_OTG_DP: 
USB_OTG_ID: 
USB_OTG_VBUS: 
VDD: 
VDD_CORE: 
VDD_DDR: 
VDD_USB: 
VDDA: 
VDDA_1V8: 
VREF+: 
pads on no net: Designator6.A1 Designator6.A2 Designator6.A3 Designator6.A4 Designator6.A5 Designator6.A6 Designator6.A7 Designator6.A8 Designator6.A9 Designator6.A10 Designator6.A11 Designator6.A12 Designator6.A13 Designator6.A14 Designator6.A15 Designator6.A16 Designator6.A17 Designator6.A18 Designator6.A19 Designator6.A20 Designator6.A21 Designator6.A22 Designator6.A23 Designator6.A24 Designator6.A25 Designator6.A26 Designator6.A27 Designator6.A28 Designator6.AA1 Designator6.AA2 Designator6.AA3 Designator6.AA4 Designator6.AA5 Designator6.AA6 Designator6.AA7 Designator6.AA9 Designator6.AA11 Designator6.AA12 Designator6.AA14 Designator6.AA15 Designator6.AA17 Designator6.AA18 Designator6.AA20 Designator6.AA22 Designator6.AA23 Designator6.AA24 Designator6.AA25 Designator6.AA26 Designator6.AA27 Designator6.AA28 Designator6.AB1 Designator6.AB2 Designator6.AB5 Designator6.AB6 Designator6.AB8 Designator6.AB9 Designator6.AB11 Designator6.AB12 Designator6.AB14 Designator6.AB15 Designator6.AB17 Designator6.AB18 Designator6.AB20 Designator6.AB21 Designator6.AB23 Designator6.AB24 Designator6.AB27 Designator6.AB28 Designator6.AC1 Designator6.AC2 Designator6.AC3 Designator6.AC4 Designator6.AC5 Designator6.AC7 Designator6.AC8 Designator6.AC9 Designator6.AC11 Designator6.AC12 Designator6.AC14 Designator6.AC15 Designator6.AC17 Designator6.AC18 Designator6.AC20 Designator6.AC21 Designator6.AC22 Designator6.AC24 Designator6.AC25 Designator6.AC26 Designator6.AC27 Designator6.AC28 Designator6.AD1 Designator6.AD2 Designator6.AD3 Designator6.AD4 Designator6.AD6 Designator6.AD7 Designator6.AD8 Designator6.AD9 Designator6.AD11 Designator6.AD12 Designator6.AD14 Designator6.AD15 Designator6.AD17 Designator6.AD18 Designator6.AD20 Designator6.AD21 Designator6.AD22 Designator6.AD23 Designator6.AD25 Designator6.AD26 Designator6.AD27 Designator6.AD28 Designator6.AE1 Designator6.AE2 Designator6.AE3 Designator6.AE5 Designator6.AE6 Designator6.AE8 Designator6.AE9 Designator6.AE11 Designator6.AE12 Designator6.AE14 Designator6.AE15 Designator6.AE17 Designator6.AE18 Designator6.AE20 Designator6.AE21 Designator6.AE23 Designator6.AE24 Designator6.AE26 Designator6.AE27 Designator6.AE28 Designator6.AF1 Designator6.AF2 Designator6.AF3 Designator6.AF4 Designator6.AF5 Designator6.AF6 Designator6.AF8 Designator6.AF9 Designator6.AF11 Designator6.AF12 Designator6.AF14 Designator6.AF15 Designator6.AF17 Designator6.AF18 Designator6.AF20 Designator6.AF21 Designator6.AF23 Designator6.AF24 Designator6.AF25 Designator6.AF26 Designator6.AF27 Designator6.AF28 Designator6.AG1 Designator6.AG2 Designator6.AG3 Designator6.AG4 Designator6.AG5 Designator6.AG6 Designator6.AG7 Designator6.AG8 Designator6.AG9 Designator6.AG10 Designator6.AG11 Designator6.AG12 Designator6.AG13 Designator6.AG14 Designator6.AG15 Designator6.AG16 Designator6.AG17 Designator6.AG18 Designator6.AG19 Designator6.AG20 Designator6.AG21 Designator6.AG22 Designator6.AG23 Designator6.AG24 Designator6.AG25 Designator6.AG26 Designator6.AG27 Designator6.AG28 Designator6.AH1 Designator6.AH2 Designator6.AH3 Designator6.AH4 Designator6.AH5 Designator6.AH6 Designator6.AH7 Designator6.AH8 Designator6.AH9 Designator6.AH10 Designator6.AH11 Designator6.AH12 Designator6.AH13 Designator6.AH14 Designator6.AH15 Designator6.AH16 Designator6.AH17 Designator6.AH18 Designator6.AH19 Designator6.AH20 Designator6.AH21 Designator6.AH22 Designator6.AH23 Designator6.AH24 Designator6.AH25 Designator6.AH26 Designator6.AH27 Designator6.AH28 Designator6.B1 Designator6.B2 Designator6.B3 Designator6.B4 Designator6.B5 Designator6.B6 Designator6.B7 Designator6.B8 Designator6.B9 Designator6.B10 Designator6.B11 Designator6.B12 Designator6.B13 Designator6.B14 Designator6.B15 Designator6.B16 Designator6.B17 Designator6.B18 Designator6.B19 Designator6.B20 Designator6.B21 Designator6.B22 Designator6.B23 Designator6.B24 Designator6.B25 Designator6.B26 Designator6.B27 Designator6.B28 Designator6.C1 Designator6.C2 Designator6.C3 Designator6.C4 Designator6.C5 Designator6.C6 Designator6.C8 Designator6.C9 Designator6.C11 Designator6.C12 Designator6.C14 Designator6.C15 Designator6.C17 Designator6.C18 Designator6.C20 Designator6.C21 Designator6.C23 Designator6.C24 Designator6.C25 Designator6.C26 Designator6.C27 Designator6.C28 Designator6.D1 Designator6.D2 Designator6.D3 Designator6.D5 Designator6.D6 Designator6.D8 Designator6.D9 Designator6.D11 Designator6.D12 Designator6.D14 Designator6.D15 Designator6.D17 Designator6.D18 Designator6.D20 Designator6.D21 Designator6.D23 Designator6.D24 Designator6.D26 Designator6.D27 Designator6.D28 Designator6.E1 Designator6.E2 Designator6.E3 Designator6.E4 Designator6.E6 Designator6.E7 Designator6.E8 Designator6.E9 Designator6.E11 Designator6.E12 Designator6.E14 Designator6.E15 Designator6.E17 Designator6.E18 Designator6.E20 Designator6.E21 Designator6.E22 Designator6.E23 Designator6.E25 Designator6.E26 Designator6.E27 Designator6.E28 Designator6.F1 Designator6.F2 Designator6.F3 Designator6.F4 Designator6.F5 Designator6.F7 Designator6.F8 Designator6.F9 Designator6.F11 Designator6.F12 Designator6.F14 Designator6.F15 Designator6.F17 Designator6.F18 Designator6.F20 Designator6.F21 Designator6.F22 Designator6.F24 Designator6.F25 Designator6.F26 Designator6.F27 Designator6.F28 Designator6.G1 Designator6.G2 Designator6.G5 Designator6.G6 Designator6.G8 Designator6.G9 Designator6.G11 Designator6.G12 Designator6.G14 Designator6.G15 Designator6.G17 Designator6.G18 Designator6.G20 Designator6.G21 Designator6.G23 Designator6.G24 Designator6.G27 Designator6.G28 Designator6.H1 Designator6.H2 Designator6.H3 Designator6.H4 Designator6.H5 Designator6.H6 Designator6.H7 Designator6.H9 Designator6.H11 Designator6.H12 Designator6.H14 Designator6.H15 Designator6.H17 Designator6.H18 Designator6.H20 Designator6.H22 Designator6.H23 Designator6.H24 Designator6.H25 Designator6.H26 Designator6.H27 Designator6.H28 Designator6.J1 Designator6.J2 Designator6.J3 Designator6.J4 Designator6.J5 Designator6.J6 Designator6.J7 Designator6.J8 Designator6.J9 Designator6.J11 Designator6.J12 Designator6.J14 Designator6.J15 Designator6.J17 Designator6.J18 Designator6.J20 Designator6.J21 Designator6.J22 Designator6.J23 Designator6.J24 Designator6.J25 Designator6.J26 Designator6.J27 Designator6.J28 Designator6.K1 Designator6.K2 Designator6.K10 Designator6.K11 Designator6.K12 Designator6.K13 Designator6.K14 Designator6.K15 Designator6.K16 Designator6.K17 Designator6.K18 Designator6.K19 Designator6.K27 Designator6.K28 Designator6.L1 Designator6.L2 Designator6.L3 Designator6.L4 Designator6.L5 Designator6.L6 Designator6.L7 Designator6.L8 Designator6.L9 Designator6.L10 Designator6.L11 Designator6.L12 Designator6.L13 Designator6.L14 Designator6.L15 Designator6.L16 Designator6.L17 Designator6.L18 Designator6.L19 Designator6.L20 Designator6.L21 Designator6.L22 Designator6.L23 Designator6.L24 Designator6.L25 Designator6.L26 Designator6.L27 Designator6.L28 Designator6.M1 Designator6.M2 Designator6.M3 Designator6.M4 Designator6.M5 Designator6.M6 Designator6.M7 Designator6.M8 Designator6.M9 Designator6.M10 Designator6.M11 Designator6.M12 Designator6.M13 Designator6.M14 Designator6.M15 Designator6.M16 Designator6.M17 Designator6.M18 Designator6.M19 Designator6.M20 Designator6.M21 Designator6.M22 Designator6.M23 Designator6.M24 Designator6.M25 Designator6.M26 Designator6.M27 Designator6.M28 Designator6.N1 Designator6.N2 Designator6.N10 Designator6.N11 Designator6.N12 Designator6.N13 Designator6.N14 Designator6.N15 Designator6.N16 Designator6.N17 Designator6.N18 Designator6.N19 Designator6.N27 Designator6.N28 Designator6.P1 Designator6.P2 Designator6.P3 Designator6.P4 Designator6.P5 Designator6.P6 Designator6.P7 Designator6.P8 Designator6.P9 Designator6.P10 Designator6.P11 Designator6.P12 Designator6.P13 Designator6.P14 Designator6.P15 Designator6.P16 Designator6.P17 Designator6.P18 Designator6.P19 Designator6.P20 Designator6.P21 Designator6.P22 Designator6.P23 Designator6.P24 Designator6.P25 Designator6.P26 Designator6.P27 Designator6.P28 Designator6.R1 Designator6.R2 Designator6.R3 Designator6.R4 Designator6.R5 Designator6.R6 Designator6.R7 Designator6.R8 Designator6.R9 Designator6.R10 Designator6.R11 Designator6.R12 Designator6.R13 Designator6.R14 Designator6.R15 Designator6.R16 Designator6.R17 Designator6.R18 Designator6.R19 Designator6.R20 Designator6.R21 Designator6.R22 Designator6.R23 Designator6.R24 Designator6.R25 Designator6.R26 Designator6.R27 Designator6.R28 Designator6.T1 Designator6.T2 Designator6.T10 Designator6.T11 Designator6.T12 Designator6.T13 Designator6.T14 Designator6.T15 Designator6.T16 Designator6.T17 Designator6.T18 Designator6.T19 Designator6.T27 Designator6.T28 Designator6.U1 Designator6.U2 Designator6.U3 Designator6.U4 Designator6.U5 Designator6.U6 Designator6.U7 Designator6.U8 Designator6.U9 Designator6.U10 Designator6.U11 Designator6.U12 Designator6.U13 Designator6.U14 Designator6.U15 Designator6.U16 Designator6.U17 Designator6.U18 Designator6.U19 Designator6.U20 Designator6.U21 Designator6.U22 Designator6.U23 Designator6.U24 Designator6.U25 Designator6.U26 Designator6.U27 Designator6.U28 Designator6.V1 Designator6.V2 Designator6.V3 Designator6.V4 Designator6.V5 Designator6.V6 Designator6.V7 Designator6.V8 Designator6.V9 Designator6.V10 Designator6.V11 Designator6.V12 Designator6.V13 Designator6.V14 Designator6.V15 Designator6.V16 Designator6.V17 Designator6.V18 Designator6.V19 Designator6.V20 Designator6.V21 Designator6.V22 Designator6.V23 Designator6.V24 Designator6.V25 Designator6.V26 Designator6.V27 Designator6.V28 Designator6.W1 Designator6.W2 Designator6.W10 Designator6.W11 Designator6.W12 Designator6.W13 Designator6.W14 Designator6.W15 Designator6.W16 Designator6.W17 Designator6.W18 Designator6.W19 Designator6.W27 Designator6.W28 Designator6.Y1 Designator6.Y2 Designator6.Y3 Designator6.Y4 Designator6.Y5 Designator6.Y6 Designator6.Y7 Designator6.Y8 Designator6.Y9 Designator6.Y11 Designator6.Y12 Designator6.Y14 Designator6.Y15 Designator6.Y17 Designator6.Y18 Designator6.Y20 Designator6.Y21 Designator6.Y22 Designator6.Y23 Designator6.Y24 Designator6.Y25 Designator6.Y26 Designator6.Y27 Designator6.Y28 Designator7.1 Designator7.2 Designator7.3 Designator7.4 Designator7.5 Designator7.6 Designator7.7 Designator7.8 Designator7.9 Designator7.10 Designator7.11 Designator7.12 Designator7.13 Designator7.14 Designator7.15 Designator7.16 Designator7.17 Designator7.18 Designator7.19 Designator7.20 Designator7.21 Designator7.22 Designator7.23 Designator7.24 Designator7.25 Designator7.26 Designator7.27 Designator7.28 Designator7.29 Designator7.30 Designator7.31 Designator7.32 Designator7.33 Designator7.34 Designator7.35 Designator7.36 Designator7.37 Designator7.38 Designator7.39 Designator7.40 Designator7.41 Designator7.42 Designator7.43 Designator7.44 Designator7.45 Designator7.46 Designator7.47 Designator7.48 Designator7.49 Designator7.50 Designator7.51 Designator7.52 Designator7.53 Designator7.54 Designator7.55 Designator7.56 Designator7.57 Designator7.58 Designator7.59 Designator7.60 Designator7.61 Designator7.62 Designator7.63 Designator7.64 Designator7.65 Designator7.66 Designator7.67 Designator7.68 Designator7.ePAD Designator8.1 Designator8.2 Designator8.3 Designator8.4 Designator8.5 Designator8.6 Designator8.7 Designator8.8 Designator8.9 Designator8.10 Designator8.11 Designator8.12 Designator8.13 Designator8.14 Designator8.15 Designator8.16 Designator8.17 Designator8.18 Designator8.19 Designator8.20 Designator8.21 Designator8.22 Designator8.23 Designator8.24 Designator8.25 Designator8.26 Designator8.27 Designator8.28 Designator8.29 Designator8.30 Designator8.31 Designator8.32 Designator8.33 Designator8.34 Designator8.35 Designator8.36 Designator8.37 Designator8.38 Designator8.39 Designator8.40 Designator8.41 Designator8.42 Designator8.43 Designator8.44 Designator8.45 Designator8.46 Designator8.47 Designator8.48 Designator8.49 U1.1A2 U1.1A3 U1.1A4 U1.1A5 U1.1A6 U1.1A7 U1.1A8 U1.1B1 U1.1B2 U1.1B3 U1.1B4 U1.1B5 U1.1B6 U1.1B7 U1.1B8 U1.1B9 U1.1C1 U1.1C2 U1.1C3 U1.1C4 U1.1C5 U1.1C6 U1.1C7 U1.1C8 U1.1C9 U1.1D1 U1.1D2 U1.1D3 U1.1D4 U1.1D5 U1.1D6 U1.1D7 U1.1D8 U1.1D9 U1.1E1 U1.1E2 U1.1E3 U1.1E4 U1.1E5 U1.1E6 U1.1E7 U1.1E8 U1.1E9 U1.1F1 U1.1F2 U1.1F3 U1.1F4 U1.1F5 U1.1F6 U1.1F7 U1.1F8 U1.1F9 U1.1G1 U1.1G2 U1.1G3 U1.1G4 U1.1G5 U1.1G6 U1.1G7 U1.1G8 U1.1G9 U1.1H1 U1.1H2 U1.1H3 U1.1H4 U1.1H5 U1.1H6 U1.1H7 U1.1H8 U1.1H9 U1.1J2 U1.1J3 U1.1J4 U1.1J5 U1.1J6 U1.1J7 U1.1J8 U1.A1 U1.A2 U1.A3 U1.A4 U1.A5 U1.A7 U1.A8 U1.A10 U1.A11 U1.A13 U1.A14 U1.A16 U1.A17 U1.A19 U1.A20 U1.A21 U1.A22 U1.A23 U1.AA1 U1.AA2 U1.AA3 U1.AA4 U1.AA5 U1.AA6 U1.AA7 U1.AA8 U1.AA9 U1.AA10 U1.AA11 U1.AA12 U1.AA13 U1.AA14 U1.AA15 U1.AA16 U1.AA17 U1.AA18 U1.AA19 U1.AA20 U1.AA21 U1.AA22 U1.AA23 U1.AB1 U1.AB2 U1.AB3 U1.AB4 U1.AB5 U1.AB6 U1.AB7 U1.AB8 U1.AB9 U1.AB10 U1.AB11 U1.AB12 U1.AB13 U1.AB14 U1.AB15 U1.AB16 U1.AB17 U1.AB18 U1.AB19 U1.AB20 U1.AB21 U1.AB22 U1.AB23 U1.AC1 U1.AC2 U1.AC3 U1.AC4 U1.AC5 U1.AC7 U1.AC8 U1.AC10 U1.AC11 U1.AC13 U1.AC14 U1.AC16 U1.AC17 U1.AC19 U1.AC20 U1.AC21 U1.AC22 U1.AC23 U1.B1 U1.B2 U1.B3 U1.B4 U1.B5 U1.B6 U1.B7 U1.B8 U1.B9 U1.B10 U1.B11 U1.B12 U1.B13 U1.B14 U1.B15 U1.B16 U1.B17 U1.B18 U1.B19 U1.B20 U1.B21 U1.B22 U1.B23 U1.C1 U1.C2 U1.C3 U1.C4 U1.C5 U1.C6 U1.C7 U1.C8 U1.C9 U1.C10 U1.C11 U1.C12 U1.C13 U1.C14 U1.C15 U1.C16 U1.C17 U1.C18 U1.C19 U1.C20 U1.C21 U1.C22 U1.C23 U1.D1 U1.D2 U1.D3 U1.D4 U1.D5 U1.D6 U1.D7 U1.D8 U1.D9 U1.D10 U1.D11 U1.D12 U1.D13 U1.D14 U1.D15 U1.D16 U1.D17 U1.D18 U1.D19 U1.D20 U1.D21 U1.D22 U1.D23 U1.E1 U1.E2 U1.E3 U1.E4 U1.E20 U1.E21 U1.E22 U1.E23 U1.F2 U1.F3 U1.F4 U1.F20 U1.F21 U1.F22 U1.G1 U1.G2 U1.G3 U1.G4 U1.G20 U1.G21 U1.G22 U1.G23 U1.H1 U1.H2 U1.H3 U1.H4 U1.H20 U1.H21 U1.H22 U1.H23 U1.J2 U1.J3 U1.J4 U1.J20 U1.J21 U1.J22 U1.K1 U1.K2 U1.K3 U1.K4 U1.K20 U1.K21 U1.K22 U1.K23 U1.L1 U1.L2 U1.L3 U1.L4 U1.L20 U1.L21 U1.L22 U1.L23 U1.M2 U1.M3 U1.M4 U1.M20 U1.M21 U1.M22 U1.N1 U1.N2 U1.N3 U1.N4 U1.N20 U1.N21 U1.N22 U1.N23 U1.P1 U1.P2 U1.P3 U1.P4 U1.P20 U1.P21 U1.P22 U1.P23 U1.R2 U1.R3 U1.R4 U1.R20 U1.R21 U1.R22 U1.T1 U1.T2 U1.T3 U1.T4 U1.T20 U1.T21 U1.T22 U1.T23 U1.U1 U1.U2 U1.U3 U1.U4 U1.U20 U1.U21 U1.U22 U1.U23 U1.V2 U1.V3 U1.V4 U1.V20 U1.V21 U1.V22 U1.W1 U1.W2 U1.W3 U1.W4 U1.W20 U1.W21 U1.W22 U1.W23 U1.Y1 U1.Y2 U1.Y3 U1.Y4 U1.Y5 U1.Y6 U1.Y7 U1.Y8 U1.Y9 U1.Y10 U1.Y11 U1.Y12 U1.Y13 U1.Y14 U1.Y15 U1.Y16 U1.Y17 U1.Y18 U1.Y19 U1.Y20 U1.Y21 U1.Y22 U1.Y23 U2.A1 U2.A2 U2.A3 U2.A7 U2.A8 U2.A9 U2.B1 U2.B2 U2.B3 U2.B7 U2.B8 U2.B9 U2.C1 U2.C2 U2.C3 U2.C7 U2.C8 U2.C9 U2.D1 U2.D2 U2.D3 U2.D7 U2.D8 U2.D9 U2.E1 U2.E2 U2.E3 U2.E7 U2.E8 U2.E9 U2.F1 U2.F2 U2.F3 U2.F7 U2.F8 U2.F9 U2.G1 U2.G2 U2.G3 U2.G7 U2.G8 U2.G9 U2.H1 U2.H2 U2.H3 U2.H7 U2.H8 U2.H9 U2.J1 U2.J2 U2.J3 U2.J7 U2.J8 U2.J9 U2.K1 U2.K2 U2.K3 U2.K7 U2.K8 U2.K9 U2.L1 U2.L2 U2.L3 U2.L7 U2.L8 U2.L9 U2.M1 U2.M2 U2.M3 U2.M7 U2.M8 U2.M9 U2.N1 U2.N2 U2.N3 U2.N7 U2.N8 U2.N9 U2.P1 U2.P2 U2.P3 U2.P7 U2.P8 U2.P9 U2.R1 U2.R2 U2.R3 U2.R7 U2.R8 U2.R9 U2.T1 U2.T2 U2.T3 U2.T7 U2.T8 U2.T9 U3.A1 U3.A2 U3.A3 U3.A7 U3.A8 U3.A9 U3.B1 U3.B2 U3.B3 U3.B7 U3.B8 U3.B9 U3.C1 U3.C2 U3.C3 U3.C7 U3.C8 U3.C9 U3.D1 U3.D2 U3.D3 U3.D7 U3.D8 U3.D9 U3.E1 U3.E2 U3.E3 U3.E7 U3.E8 U3.E9 U3.F1 U3.F2 U3.F3 U3.F7 U3.F8 U3.F9 U3.G1 U3.G2 U3.G3 U3.G7 U3.G8 U3.G9 U3.H1 U3.H2 U3.H3 U3.H7 U3.H8 U3.H9 U3.J1 U3.J2 U3.J3 U3.J7 U3.J8 U3.J9 U3.K1 U3.K2 U3.K3 U3.K7 U3.K8 U3.K9 U3.L1 U3.L2 U3.L3 U3.L7 U3.L8 U3.L9 U3.M1 U3.M2 U3.M3 U3.M7 U3.M8 U3.M9 U3.N1 U3.N2 U3.N3 U3.N7 U3.N8 U3.N9 U3.P1 U3.P2 U3.P3 U3.P7 U3.P8 U3.P9 U3.R1 U3.R2 U3.R3 U3.R7 U3.R8 U3.R9 U3.T1 U3.T2 U3.T3 U3.T7 U3.T8 U3.T9
copper on no net:
  other v1: 30.82,24.851 31.92,24.851 33.02,24.851 34.12,24.851 35.22,24.851 30.82,25.951 31.92,25.951 33.02,25.951 34.12,25.951 35.22,25.951 30.82,27.051 31.92,27.051 33.02,27.051 34.12,27.051 35.22,27.051 30.82,28.151 31.92,28.151 33.02,28.151 34.12,28.151 35.22,28.151 30.82,29.251 31.92,29.251 33.02,29.251 34.12,29.251 35.22,29.251
  other v2: 37.616,11.454 38.616,11.454 39.616,11.454 40.616,11.454 37.616,12.454 38.616,12.454 39.616,12.454 40.616,12.454 37.616,13.454 38.616,13.454 39.616,13.454 40.616,13.454 37.616,14.454 38.616,14.454 39.616,14.454 40.616,14.454

## Polygon pours and split planes (outlines as drawn)
no net on Top Solder "NONET_L-01_P-001" (solid): 0,0 0,2.55 67.6,2.55 67.6,0
no net on Bottom Solder "NONET_L-01_P-001" (solid): 0,0 0,2.55 67.6,2.55 67.6,0

## Silkscreen, mask and mechanical layers (free items; w line width, h text height)
Construction:
  lines w0.1: 0,23 cw(c0,20) 3,20 3,4 14.25,4 14.25,4.2 18.25,4.2 18.25,4 64.6,4 64.6,20 cw(c67.6,20) 67.6,23 67.6,35.3 0,35.3 0,23
M2 Board Dimensions:
  lines w0.1: 33.8,-6.643 33.8,47.86
Board Outline:
  circle w0.1: c65.15,1.4 r0.223
  circle w0.1: c64.55,1.4 r0.223
  circle w0.1: c63.95,1.4 r0.223
  circle w0.1: c63.35,1.4 r0.223
  circle w0.1: c62.75,1.4 r0.223
  circle w0.1: c62.15,1.4 r0.223
  circle w0.1: c61.55,1.4 r0.223
  circle w0.1: c60.95,1.4 r0.223
  circle w0.1: c60.35,1.4 r0.223
  circle w0.1: c59.75,1.4 r0.223
  circle w0.1: c59.15,1.4 r0.223
  circle w0.1: c58.55,1.4 r0.223
  circle w0.1: c57.95,1.4 r0.223
  circle w0.1: c57.35,1.4 r0.223
  circle w0.1: c56.75,1.4 r0.223
  circle w0.1: c56.15,1.4 r0.223
  circle w0.1: c55.55,1.4 r0.223
  circle w0.1: c54.95,1.4 r0.223
  circle w0.1: c54.35,1.4 r0.223
  circle w0.1: c53.75,1.4 r0.223
  circle w0.1: c53.15,1.4 r0.223
  circle w0.1: c52.55,1.4 r0.223
  circle w0.1: c51.95,1.4 r0.223
  circle w0.1: c51.35,1.4 r0.223
  circle w0.1: c50.75,1.4 r0.223
  circle w0.1: c50.15,1.4 r0.223
  circle w0.1: c49.55,1.4 r0.223
  circle w0.1: c48.95,1.4 r0.223
  circle w0.1: c48.35,1.4 r0.223
  circle w0.1: c47.75,1.4 r0.223
  circle w0.1: c47.15,1.4 r0.223
  circle w0.1: c46.55,1.4 r0.223
  circle w0.1: c45.95,1.4 r0.223
  circle w0.1: c45.35,1.4 r0.223
  circle w0.1: c44.75,1.4 r0.223
  circle w0.1: c44.15,1.4 r0.223
  circle w0.1: c43.55,1.4 r0.223
  circle w0.1: c42.95,1.4 r0.223
  circle w0.1: c42.35,1.4 r0.223
  circle w0.1: c41.75,1.4 r0.223
  circle w0.1: c41.15,1.4 r0.223
  circle w0.1: c40.55,1.4 r0.223
  circle w0.1: c39.95,1.4 r0.223
  circle w0.1: c39.35,1.4 r0.223
  circle w0.1: c38.75,1.4 r0.223
  circle w0.1: c38.15,1.4 r0.223
  circle w0.1: c37.55,1.4 r0.223
  circle w0.1: c36.95,1.4 r0.223
  circle w0.1: c36.35,1.4 r0.223
  circle w0.1: c35.75,1.4 r0.223
  circle w0.1: c35.15,1.4 r0.223
  circle w0.1: c34.55,1.4 r0.223
  circle w0.1: c33.95,1.4 r0.223
  circle w0.1: c33.35,1.4 r0.223
  circle w0.1: c32.75,1.4 r0.223
  circle w0.1: c32.15,1.4 r0.223
  circle w0.1: c31.55,1.4 r0.223
  circle w0.1: c30.95,1.4 r0.223
  circle w0.1: c30.35,1.4 r0.223
  circle w0.1: c29.75,1.4 r0.223
  circle w0.1: c29.15,1.4 r0.223
  circle w0.1: c28.55,1.4 r0.223
  circle w0.1: c27.95,1.4 r0.223
  circle w0.1: c27.35,1.4 r0.223
  circle w0.1: c26.75,1.4 r0.223
  circle w0.1: c26.15,1.4 r0.223
  circle w0.1: c25.55,1.4 r0.223
  circle w0.1: c24.95,1.4 r0.223
  circle w0.1: c24.35,1.4 r0.223
  circle w0.1: c23.75,1.4 r0.223
  circle w0.1: c23.15,1.4 r0.223
  circle w0.1: c22.55,1.4 r0.223
  circle w0.1: c21.95,1.4 r0.223
  circle w0.1: c21.35,1.4 r0.223
  circle w0.1: c20.75,1.4 r0.223
  circle w0.1: c20.15,1.4 r0.223
  circle w0.1: c19.55,1.4 r0.223
  circle w0.1: c18.95,1.4 r0.223
  circle w0.1: c18.35,1.4 r0.223
  circle w0.1: c2.15,1.4 r0.223
  circle w0.1: c2.75,1.4 r0.223
  circle w0.1: c3.35,1.4 r0.223
  circle w0.1: c3.95,1.4 r0.223
  circle w0.1: c4.55,1.4 r0.223
  circle w0.1: c5.15,1.4 r0.223
  circle w0.1: c5.75,1.4 r0.223
  circle w0.1: c6.35,1.4 r0.223
  circle w0.1: c6.95,1.4 r0.223
  circle w0.1: c7.55,1.4 r0.223
  circle w0.1: c8.15,1.4 r0.223
  circle w0.1: c8.75,1.4 r0.223
  circle w0.1: c9.35,1.4 r0.223
  circle w0.1: c9.95,1.4 r0.223
  circle w0.1: c10.55,1.4 r0.223
  circle w0.1: c11.15,1.4 r0.223
  circle w0.1: c11.75,1.4 r0.223
  circle w0.1: c12.35,1.4 r0.223
  circle w0.1: c12.95,1.4 r0.223
  circle w0.1: c17.75,1.4 r0.223
  circle w0.1: c13.55,1.4 r0.223
  circle w0.1: c65.6,6 r0.9
  circle w0.1: c2,6 r0.9
  lines w0.1: 16.25,-3.083 16.25,3.5 ; 0,0 0,18 ccw(c0,20) 0,22 0,35.3 67.6,35.3 67.6,22 ccw(c67.6,20) 67.6,18 67.6,0 16.75,0 16.75,3.5 ccw(c16.25,3.5) 15.75,3.5 15.75,0 0,0

## Text inside footprints (layer, text, board x,y; h text height)
Designator8: M7 LPKF Text Top "Stencil 0.125mm" at 33.736,7.93 h1
U1: M14 Component Bodies Bottom "1A2" at 52.524,14.197 h0.5; M14 Component Bodies Bottom "A1" at 49.099,17.097 h0.5
U2: M14 Component Bodies Bottom "A1" at 45.015,33.073 h0.75
U3: M14 Component Bodies Bottom "A1" at 56.14,33.359 h0.75